# Altium PCB BuckBoostPCB.PcbDoc
Units mil, origin at the board's own origin, x right, y up, seen from the top; angles counter-clockwise.
Board outline 3600 x 2000 mil, 2 copper layers (Top Layer, Bottom Layer); 67 components, 34 nets, 185 pads, 94 vias.
Unrouted connection lines stored in the file: 4.
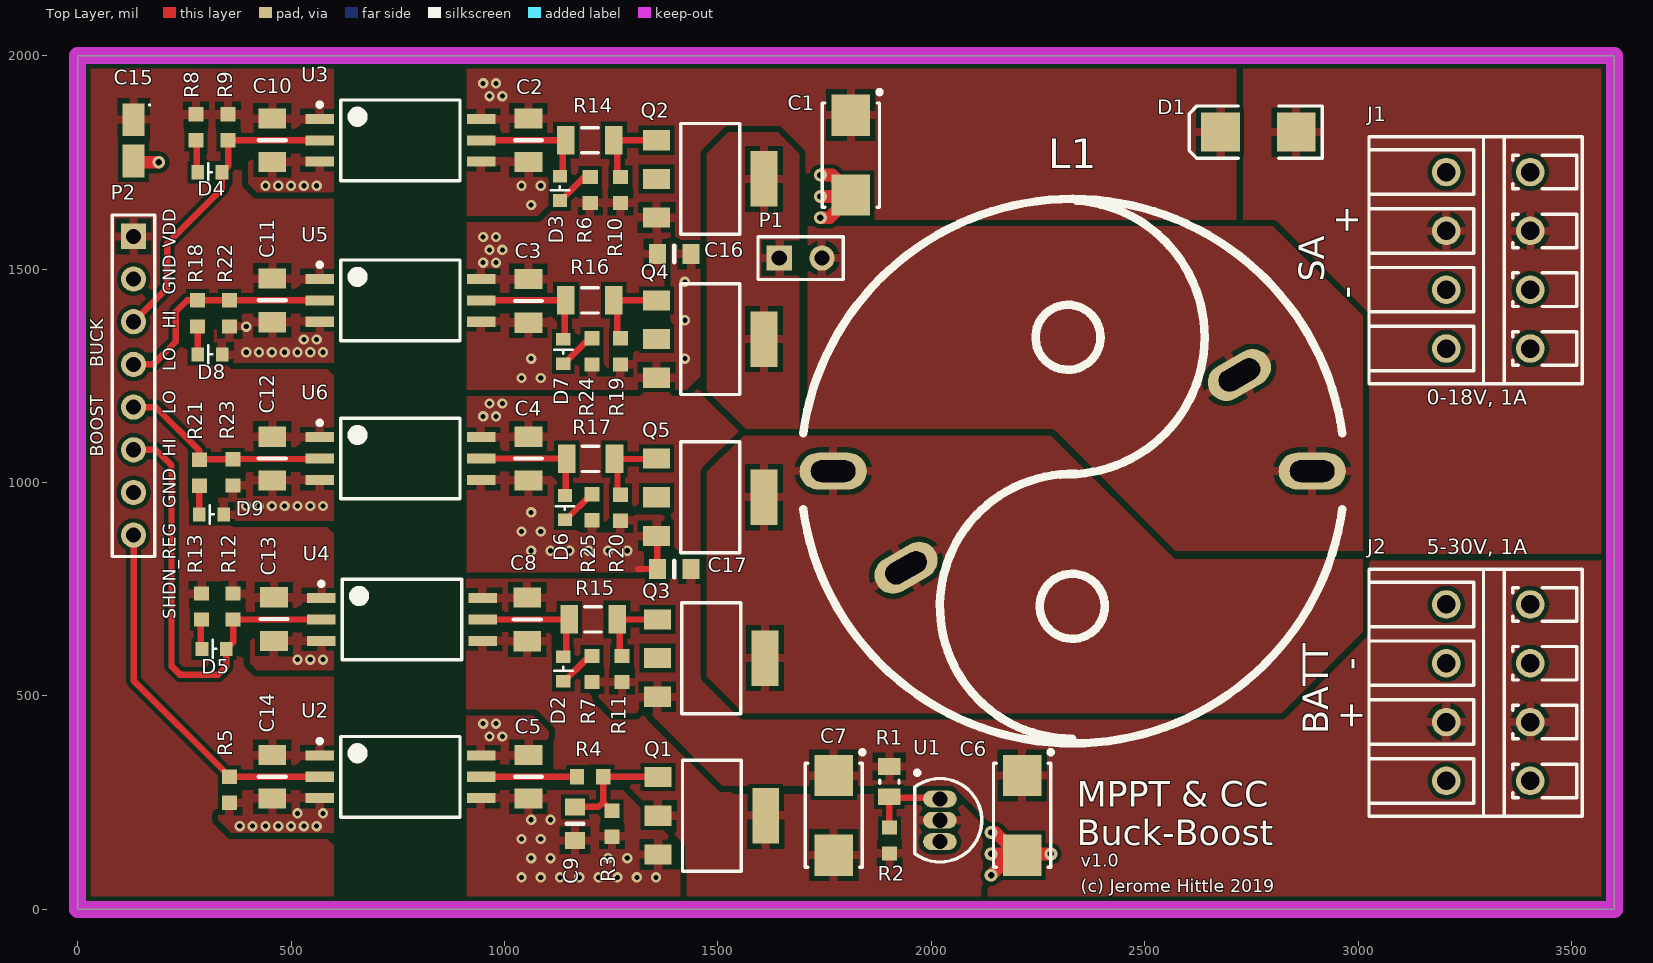
[diagram p0: Top Layer view]
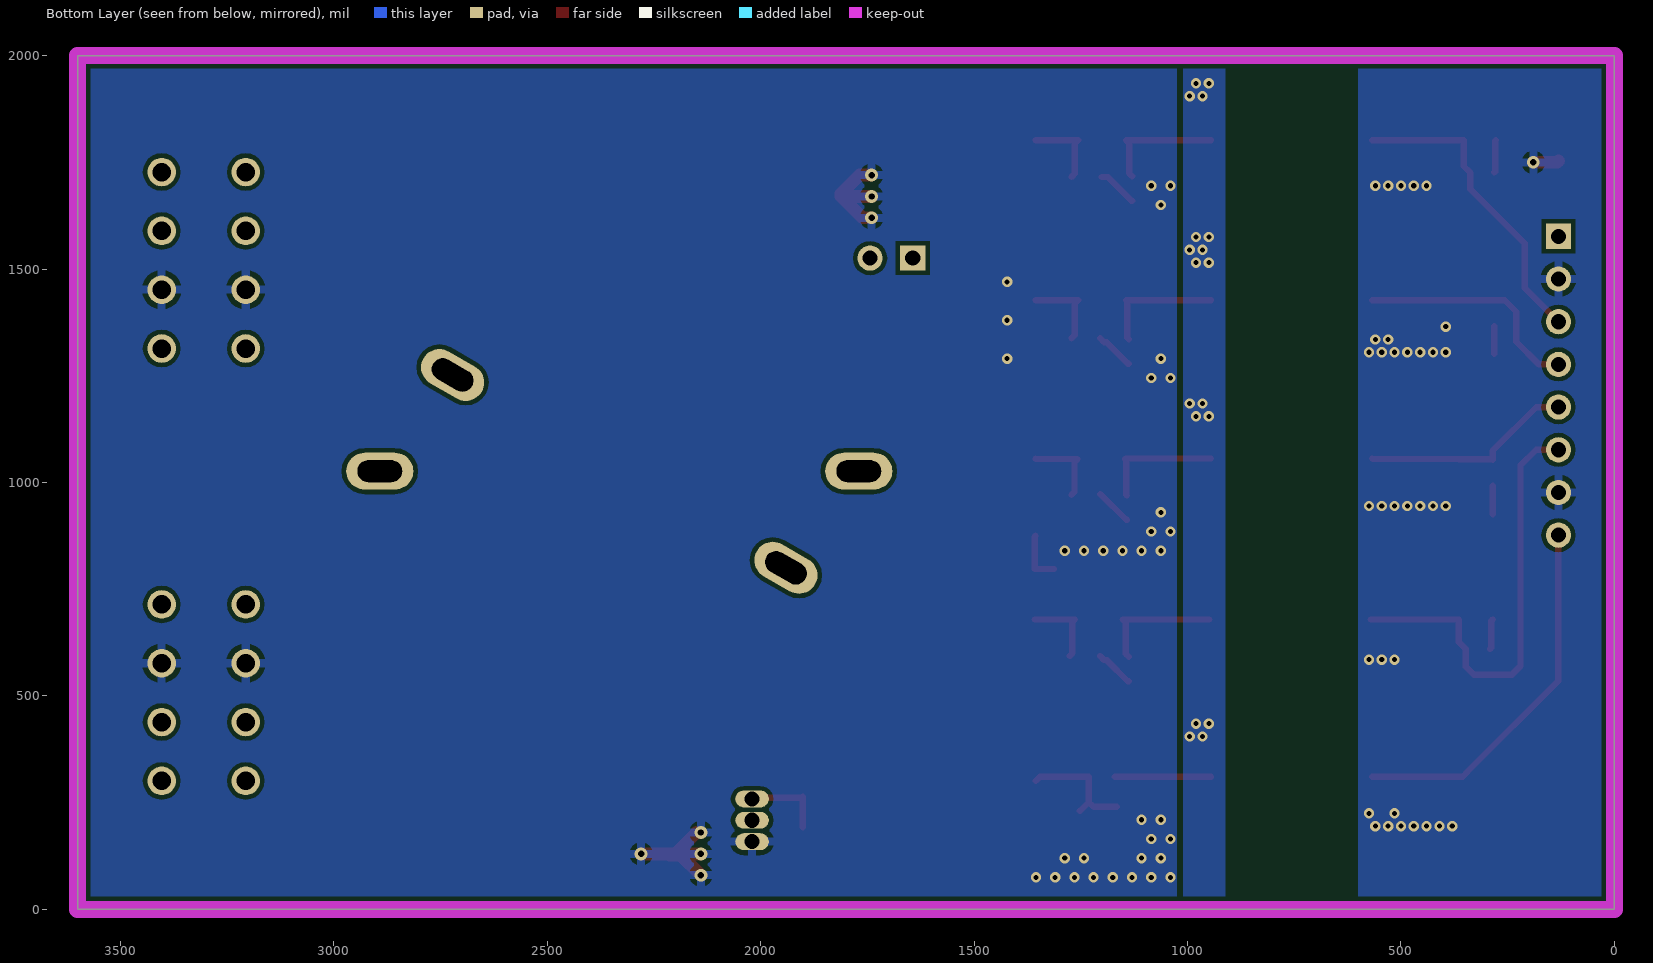
[diagram p1: Bottom Layer view, seen from below]

## Layer stack, top to bottom
Top Solder: solder mask 0.4, Solder Resist, Dk 3.5
Top Layer: signal copper 1.4
Dielectric 1: dielectric 12.6, FR-4, Dk 4.8
Bottom Layer: signal copper 1.4
Bottom Solder: solder mask 0.4, Solder Resist, Dk 3.5

## Board outline
0,0 3600,0 3600,2000 0,2000

## Design rules (kind name [scope] priority, off if disabled: settings)
BoardOutlineClearance [All] p1: gap=20 ignorepadtopadclearanceinfootprint=FALSE
Clearance Clearance_1 [All] p1: gap=8 ignorepadtopadclearanceinfootprint=FALSE except(10: Arc-Fill Arc-Poly Arc-Region Track-Fill Track-Poly Track-Region SMDPad-Fill SMDPad-Poly SMDPad-Region THPad-Fill THPad-Poly THPad-Region Via-Fill Via-Poly Via-Region; 15: Fill-Fill Fill-Poly Fill-Region Poly-Poly Poly-Region Region-Region)
MinimumSolderMaskSliver [All] p1: minsoldermaskwidth=4
PlaneConnect [All] p1: planeconnectstyle=Relief reliefexpansion=20 reliefentries=4 reliefconductorwidth=20 reliefairgap=12
PolygonConnect Stitching [IsStitchingVia] p1: connectstyle=Direct reliefconductorwidth=10 reliefentries=4 polygonreliefangle="90 Angle" airgapwidth=10
PolygonConnect [All] p2: connectstyle=Relief reliefconductorwidth=20 reliefentries=4 polygonreliefangle="90 Angle" airgapwidth=12
RoutingVias [All] p1: holewidth=15 width=30 viastyle="Through Hole" minholewidth=12 minwidth=20 maxholewidth=28 maxwidth=50
SilkToSilkClearance [All] p1: silktosilkclearance=4
SilkToSolderMaskClearance [IsPad] p1: minsilkscreentomaskgap=4 clearancetoexposedcopper=TRUE
SolderMaskExpansion [All] p1: expansion=4
Width [All] p1: maxlimit=30 minlimit=8 preferedwidth=12 minimp=50.000000 maximp=50.000000 favimp=50.000000
26 further rules are at their usual default settings.

## Components (designator, comment, footprint, x,y, rotation, side; value= is the part's Value field where it differs from the comment)
C1 "Cap Polarized" "C2312 Tantalum" 1811.5,1766.89 r270 top value=10uF
C2 "Cap Chip" C0805 1056.1,1801.57 r90 top value=0.1uF
C3 "Cap Chip" C0805 1056.1,1425.39 r90 top value=0.1uF
C4 "Cap Chip" C0805 1056.1,1056.1 r90 top value=0.1uF
C5 "Cap Chip" C0805 1056.1,310.63 r90 top value=0.1uF
C6 "Cap Polarized" "C2312 Tantalum" 2212.6,220.47 r270 top value=1uF
C7 "Cap Polarized" "C2312 Tantalum" 1771.26,220.47 r270 top value=10uF
C8 "Cap Chip" C0805 1053.15,679.13 r90 top value=0.1uF
C9 "Cap Chip" C0603 1165.35,200.79 r270 top value=0.1uF
C10 "Cap Chip" C0805 456.1,1801.57 r90 top value=0.1uF
C11 "Cap Chip" C0805 456.1,1426.57 r90 top value=0.1uF
C12 "Cap Chip" C0805 456.1,1056.1 r90 top value=0.1uF
C13 "Cap Chip" C0805 460,680 r90 top value=0.1uF
C14 "Cap Chip" C0805 456.1,310.63 r90 top value=0.1uF
C15 "Cap Polarized" "C1206 Tantalum" 131.1,1801.57 r270 top value=10uF
C16 "Cap Chip" C0603 1397.64,1535.43 r180 top value=0.1uF
C17 "Cap Chip" C0603 1397.64,797.24 r0 top value=0.1uF
D1 "MBRS260T3G" SMB 2765.75,1820.87 r180 top
D2 "RED" 0603_LED_Red 1137.8,562.99 r90 top
D3 "RED" 0603_LED_Red 1129.92,1688.98 r90 top
D4 "RED" 0603_LED_Red 309.65,1726.57 r0 top
D5 "RED" 0603_LED_Red 320,610 r0 top
D6 "RED" 0603_LED_Red 1141.73,940.94 r270 top
D7 "RED" 0603_LED_Red 1137.8,1307.09 r270 top
D8 "RED" 0603_LED_Red 310,1300 r0 top
D9 "RED" 0603_LED_Red 313.98,925.2 r0 top
J1 "1885670000" 1885670000 3275,1520.47 r90 top
J2 "1885670000" 1885670000 3275,507.68 r90 top
L1 "Inductor" 141060XC 2331.1,1026.57 r180 top value=10mH
P1 "" HDR1X2 1643.7,1525.59 r0 top
P2 "Header 8" HDR1X8 131.1,1576.57 r270 top
Q1 "BSP716N" SOT223 1485.98,219.45 r0 top
Q2 "ZXMP6A17G" SOT223 1482.09,1711.02 r0 top
Q3 "ZXMP6A17G" SOT223 1484.25,588.58 r0 top
Q4 "BSP716N" SOT223 1482.09,1336.02 r0 top
Q5 "BSP716N" SOT223 1482.09,965.55 r0 top
R1 "Resistor_Chip" R0805 1901.57,299.21 r270 top value=2.15k
R2 "Resistor_Chip" R0603 1901.57,161.42 r270 top value=249
R3 "Resistor_Chip" R0603 1251.97,200.79 r90 top value=1.0M
R4 "Resistor_Chip" R0603 1200.59,310.63 r180 top value=10k
R5 "Resistor_Chip" R0603 356.1,280.12 r270 top value=10k
R6 "Resistor_Chip" R0603 1200.79,1685.04 r90 top value=2k
R7 "Resistor_Chip" R0603 1204.72,562.99 r90 top value=2k
R8 "Resistor_Chip" R0603 277.56,1832.09 r90 top value=470
R9 "Resistor_Chip" R0603 352.56,1832.09 r90 top value=10k
R10 "Resistor_Chip" R0603 1271.65,1685.04 r270 top value=1.0M
R11 "Resistor_Chip" R0603 1275.59,562.99 r270 top value=1.0M
R12 "Resistor_Chip" R0603 364.17,709.65 r90 top value=10k
R13 "Resistor_Chip" R0603 290,709.49 r90 top value=470
R14 "Resistor_Chip" R1206 1200,1801.57 r0 top value=10
R15 "Resistor_Chip" R1206 1207.68,679.13 r180 top value=10
R16 "Resistor_Chip" R1206 1200,1426.57 r0 top value=10
R17 "Resistor_Chip" R1206 1201.77,1055.12 r180 top value=10
R18 "Resistor_Chip" R0603 281.1,1396.06 r90 top value=470
R19 "Resistor_Chip" R0603 1271.65,1307.09 r90 top value=1.0M
R20 "Resistor_Chip" R0603 1271.65,940.94 r90 top value=1.0M
R21 "Resistor_Chip" R0603 285.43,1022.64 r90 top value=470
R22 "Resistor_Chip" R0603 356.1,1396.06 r90 top value=10k
R23 "Resistor_Chip" R0603 364.17,1023.62 r90 top value=10k
R24 "Resistor_Chip" R0603 1204.72,1307.09 r270 top value=2k
R25 "Resistor_Chip" R0603 1204.72,941.93 r90 top value=2k
U1 "LM337L" TO-92A 2020.08,208.66 r180 top
U2 "ADuM4120" "SOIC RI-6-1" 756.1,310.63 r0 top
U3 "ADuM4120" "SOIC RI-6-1" 756.1,1801.57 r0 top
U4 "ADuM4120" "SOIC RI-6-1" 759.84,679.13 r0 top
U5 "ADuM4120" "SOIC RI-6-1" 756.1,1426.57 r0 top
U6 "ADuM4120" "SOIC RI-6-1" 756.1,1056.1 r0 top

## Footprints (in the part's own frame and the unit in brackets; to place one, negate y for a bottom-side part, rotate by r counter-clockwise, add the part's x,y. Pads: shape width x height; smd on the part's side, far side on the other; paste and mask are expansions set on the pad)
0603_LED_Red [mm] "Chip LED Diode, 2-Leads, Body 1.60x0.75mm, IPC Medium Density"
  rect 0.75x0.85 smd: 1(-0.725,0) 2(0.725,0)
  silkscreen extent -0.1,-0.55 0.12,0.55, body extent -0.85,-0.4 0.85,0.4, height 0.45
141060XC [mm] "10mH inductor 1410606C or 1410604C"
  oval 4x2.2 hole 1.3 slot 2.65 at 0 deg: 1(-14.25,0) 2(14.25,0)
  oval 4x2.2 hole 1.3 slot 2.65 at 30 deg rot 30: 1(-9.916,-5.725) 2(9.916,5.75)
  silkscreen extent -16.04,-16.2 16.04,16.2, body extent -16.2,-16.2 16.2,16.2, height 23.5
1885670000 [mm] "TERM BLOCK 4POS 45DEG 3.5MM PCB"
  round 1.7 hole 1.1: 1(-5.25,-3.25) 1(-5.25,1.75) 2(-1.75,1.75) 2(-1.75,-3.25) 3(1.75,1.75) 3(1.75,-3.25) 4(5.25,-3.25) 4(5.25,1.75)
  silkscreen extent -7.35,-6.35 7.35,6.35, body extent -7.35,-6.35 7.35,6.35, height 13.17
C0603 [mm] "Chip Capacitor, 2-Leads, 0603, IPC Medium Density"
  rect 1x1.2 smd: 1(-1,0) 2(1,0)
  silkscreen extent 0,-0.5 0,0.5, body extent -0.85,-0.45 0.85,0.45, height 0.9
C0805 [mm] "Chip Capacitor, 2-Leads, 0805, IPC Medium Density"
  rect 1.2x1.65 smd: 1(-1.3,0) 2(1.3,0)
  silkscreen extent 0,-0.8 0,0.8, body extent -1.05,-0.67 1.05,0.67, height 1.35
"C1206 Tantalum" [mm] "Molded Capacitor, 2-Leads, Body 3.20x1.65mm, IPC Medium Density"
  rect 1.95x1.3 smd: 1(-1.225,0) 2(1.225,0)
  silkscreen extent -2.15,0.9 -2.05,1, body extent -1.92,-0.9 1.92,0.9, height 1.8
"C2312 Tantalum" [mm] "Molded Capacitor, 2-Leads, Body 6.00x3.25mm, IPC Medium Density"
  rect 2.45x2.3 smd: 1(-2.375,0) 2(2.375,0)
  silkscreen extent -3.87,-1.7 3.1,1.83, body extent -3.32,-1.7 3.32,1.7, height 2.8
HDR1X2 [mm] "Connector; Header; 2 Position"
  rect 1.5x1.5 hole 0.9: 1(0,0)
  round 1.5 hole 0.9: 2(2.54,0)
  silkscreen extent -1.27,-1.27 3.81,1.27
HDR1X8 [mm] "Connector; Header; 8 Position"
  rect 1.5x1.5 hole 0.9: 1(0,0)
  round 1.5 hole 0.9: 2(2.54,0) 3(5.08,0) 4(7.62,0) 5(10.16,0) 6(12.7,0) 7(15.24,0) 8(17.78,0)
  silkscreen extent -1.27,-1.27 19.05,1.27
R0603 [mm] "Chip Resistor, 2-Leads, 0603, IPC Medium Density"
  rect 0.85x0.9 smd: 1(-0.775,0) 2(0.775,0)
  body extent -0.85,-0.45 0.85,0.45, height 0.55
R0805 [mm] "Chip Resistor, 2-Leads, 0805, IPC Medium Density"
  rect 1x1.35 smd: 1(-0.9,0) 2(0.9,0)
  silkscreen extent -0.1,-0.58 0.1,0.58, body extent -1.05,-0.67 1.05,0.67, height 0.6
R1206 [mm] "Chip Resistor, 2-Leads, 1206, IPC Medium Density"
  rect 1.05x1.7 smd: 1(-1.425,0) 2(1.425,0)
  silkscreen extent -0.5,-0.75 0.5,0.75, body extent -1.6,-0.85 1.6,0.85, height 0.65
SMB [mm] "DO-214-AA/SMB; 2 C-Bend Leads; Body 5.3 x 3.6 mm, inc. leads (LxW)"
  rect 2.3x2.3 smd: 1(-2.25,0) 2(2.25,0)
  silkscreen extent -3.8,-1.55 4.1,1.55
"SOIC RI-6-1" [mm] "SOIC, 6-Leads, Wide Body 4.58x7.50mm, Pitch 1.27mm, IPC Medium Density"
  rect 1.7x0.6 smd: 1(-4.8,1.27) 2(-4.8,0) 3(-4.8,-1.27) 4(4.8,-1.27) 5(4.8,0) 6(4.8,1.27)
  silkscreen extent -4.92,-2.4 3.55,2.4, body extent -5.16,-2.4 5.16,2.4, height 2.65
SOT223 [mm] "SOT223, 4-Leads, Body 6.50x7.00mm (avg), Pitch 2.30mm, IPC Medium Density"
  rect 1.6x1.2 smd: 1(-3.2,2.3) 2(-3.2,0) 3(-3.2,-2.3)
  rect 1.6x3.3 smd: 2(3.2,0)
  silkscreen extent -1.75,-3.3 1.75,3.3, body extent -1.78,-3.27 1.78,3.27, height 1.65
TO-92A [mm] "TO, Flat Index; 3 In-Line, Axial Leads; Body Dia. 4.5mm; Leads 0.51 x 0.48 mm (max)"
  oval 2x1 hole 0.9 mask+0.076: 1(0,-1.27) 2(0,0) 3(0,1.27)
  silkscreen extent -2.48,-2.95 1.5,2.48, body extent -2.48,-2.5 1.5,2.5, height 6.86

## Part data
C1 C7: "Capacitor, 600mohm, 200mA@100kHz", Part Number=TRJC106K035R0600, Voltage=35V
C2 C3 C4 C5 C8 C10 C11 C12 C13 C14: "Capacitor", Part Number=CL21B104KBCNNNC, Voltage=50V
C6: "Capacitor, 600mohm, 200mA@100kHz", Part Number=TAJC105K050RNJ, Voltage=50V
C9 C16 C17: "Capacitor", Part Number=CL10B104KB8NNNC, Voltage=50V
C15: "Capacitor, 600mohm, 200mA@100kHz", Part Number=TAJA106K016RNJV, Voltage=16V
D1: library part "D Schottky", "Schottky Diode", LatestRevisionDate=17-Jul-2002, LatestRevisionNote="Re-released for DXP Platform.", PackageDescription="DO-214-AA/SMB; 2 C-Bend Leads; Body 5.3 x 3.6 mm, inc. leads (LxW)", PackageReference=SMB, Part Number=MBRS260T3G, Published=8-Jun-2000, Publisher="Altium Limited"
D2 D3 D4 D5 D6 D7 D8 D9: library part LED0, "Red LED", Part Number=LTST-C193KRKT-5A, LatestRevisionDate=08-Jul-2005, LatestRevisionNote="Mech Layer 1 removed.", PackageDescription="LED; 2 Leads", PackageReference=LED-0, Published=8-Jun-2000, Publisher="Altium Limited"
J1 J2: "TERM BLOCK 4POS 45DEG 3.5MM PCB", Current=12A, Voltage=300V, 1k Price=0.85073, ComponentLink1Description=Digikey, ComponentLink1URL=https://www.digikey.com/product-detail/en/1885670000/281-2811-ND/2410728?utm_campaign=buynow&WT.z_cid=ref_octopart_dkc_buynow&utm_medium=aggregator&curr=usd&site=us&utm_source=octopart, ComponentLink2Description=Datasheet, ComponentLink2URL=https://media.digikey.com/pdf/Data%20Sheets/Weidmuller%20PDFs/1885670000.pdf, Part Number=1885670000
L1: Part Number="1410606C or 1410604C", Code_IEC=1005, Code_JEITA=0402, LatestRevisionDate=29-May-2009, LatestRevisionNote="IPC-7351 Footprint Added.", PackageDescription="Chip Inductor", PackageReference=0402-A, Published=8-Jun-2000, Publisher="Altium Limited"
P1: library part "Header 2", "Header, 2-Pin, 100mil", LatestRevisionDate=17-Jul-2002, LatestRevisionNote="Re-released for DXP Platform.", Publisher="Altium Limited"
P2: "Header, 8-Pin, 100mil", LatestRevisionDate=17-Jul-2002, LatestRevisionNote="Re-released for DXP Platform.", Publisher="Altium Limited"
Q1 Q4 Q5: library part NMOS, "N-Channel MOSFET", Part Number=BSP716NH6327XTSA1
Q2 Q3: library part PMOS, "P-Channel MOSFET", Part Number=ZXMP6A17GTA
R1: "Resistor", Part Number=RC0805FR-072K15L, Power=0.125
R2: "Resistor", Part Number=RC0603FR-07249RL, Power=0.100
R3 R10 R11 R19 R20: "Resistor", Part Number=RC0603FR-071ML, Power=0.100
R4 R5 R9 R12 R22 R23: "Resistor", Part Number=RC0603FR-0710KL, Power=0.100
R6 R7 R24 R25: "Resistor", Part Number=RC0805FR-072KL, Power=0.125
R8 R13 R18 R21: "Resistor", Part Number=RC0603FR-07470RL, Power=0.100
R14 R15 R16 R17: "Resistor", Part Number=RC1206FR-0710RL, Power=0.250
U1: library part "Neg Volt Reg - Adj", "Negative Voltage Regulator", Part Number=LM337LZ/NOPB
U2 U3 U4 U5 U6: "Isolated Gate-Driver", Part Number=ADuM4120-1ARIZ

## Via types
v1: diameter 24, hole 12, Top Layer to Bottom Layer, tented both sides, 86 vias
v2: diameter 30, hole 15, Top Layer to Bottom Layer, tented both sides, 8 vias

## Nets (pads, with @x,y where several pads share a name; then routed paths per layer and width w, separated by ;. In a path a pad name is that pad's centre, name@x,y a point inside that pad or via, vN(x,y) a via of type N, cw(c..) or ccw(c..) an arc to the next point about the centre after c; other vN are vias at no path point)
3.3V: C10.2 C11.2 C12.2 C13.2 C14.2 C15.1 P2.1 R8.2 R9.2 R12.2 R13.2 U2.1 U3.1 U4.1 U5.1 U6.1
-12V: C7.2 C8.1 Q1.2 R2.2 U1.2 U4.4
BOOST_HI: D5.2 P2.6 R12.1 U4.2 | length 1042.2
  Top Layer w15: P2.6 183.43,1076.57 220,1040 220,570 240,550 329.76,550 348.54,568.79 D5.2 364.17,625.63 R12.1 U4.2
BOOST_LO: P2.5 R21.2 R23.2 U6.2 | length 500.9
  Top Layer w15: P2.5 183.43,1176.57 285.43,1074.57 R21.2 286.42,1054.13 R23.2 365.16,1055.12 566.14,1055.12 U6.2
BUCK_HI: D4.2 P2.3 R9.1 U3.2 | length 731.3
  Top Layer w15: P2.3 210,1455.47 210,1560 337.34,1687.34 337.34,1725.73 D4.2 352.56,1740.94 R9.1 U3.2
BUCK_LO: P2.4 R18.2 R22.2 U5.2 | length 534.5
  Top Layer w15: P2.4 176.57,1276.57 230.04,1330.04 230.04,1400.04 256.57,1426.57 R18.2 ; R18.2@285.76,1426.57 R22.2 U5.2
NetC9_1: C9.1 Q1.1 R3.2 R4.1 | length 286.8
  Top Layer w15: C9.1 1220.08,240.16 1231.1,251.18 ; R3.2 1250.98,231.3 1231.1,251.18 ; Q1.1@1355.12,301.18 1345.67,310.63 R4.1 1231.1,251.18
NetD1_1: D1.1 J1.3
NetD2_1: D2.1 R7.2 | length 91.4
  Top Layer w15: D2.1 1139.76,534.45 1189.59,584.27 1195.49,584.27 R7.2
NetD2_2: D2.2 R15.2 U4.5 | length 296.1
  Top Layer w15: U4.5 R15.2 1144.69,672.24 1144.69,598.43 D2.2
NetD3_1: D3.1 R6.2 | length 93.7
  Top Layer w15: D3.1 1131.89,1660.43 1187.01,1715.55 R6.2
NetD3_2: D3.2 R14.1 U3.5 | length 288.7
  Top Layer w15: U3.5 R14.1 1136.91,1794.59 1136.91,1724.51 D3.2
NetD4_1: D4.1 R8.1 | length 76.5
  Top Layer w15: R8.1 279.33,1799.8 279.33,1728.35 D4.1
NetD5_1: D5.1 R13.1 | length 71.6
  Top Layer w15: R13.1@285.43,679.13 288.44,676.12 288.44,613.01 D5.1
NetD6_1: D6.1 R17.2 U6.5 | length 288.3
  Top Layer w15: U6.5 1144.69,1056.1 R17.2 1143.7,1053.15 1143.7,971.46 D6.1
NetD6_2: D6.2 R25.2 | length 87.9
  Top Layer w15: D6.2 1143.7,912.4 1203.74,972.44 R25.2
NetD7_1: D7.1 R16.1 U5.5 | length 292.3
  Top Layer w15: U5.5 R16.1 1140.85,1423.52 1140.85,1338.68 D7.1
NetD7_2: D7.2 R24.1 | length 91.4
  Top Layer w15: D7.2 1139.76,1278.54 1189.59,1328.37 1195.49,1328.37 R24.1
NetD8_1: D8.1 R18.1 | length 64
  Top Layer w15: D8.1@281.1,1301.57 R18.1
NetD9_1: D9.1 R21.1 | length 66.9
  Top Layer w15: D9.1 R21.1
NetL1_1: L1.1 P1.2
NetL1_2: L1.2 Q3.2 Q5.2
NetP1_1: P1.1 Q2.2 Q4.2
NetQ2_G: Q2.1 R10.1 R14.2 | length 192.5
  Top Layer w15: R10.1 1263.88,1723.33 1263.88,1793.8 R14.2 Q2.1
NetQ3_G: Q3.1 R11.1 R15.1 | length 185
  Top Layer w15: R11.1 1269.69,599.41 1269.69,673.23 R15.1 Q3.1
NetQ4_G: Q4.1 R16.2 R19.2 | length 195.4
  Top Layer w15: R19.2 1263.88,1345.37 1263.88,1418.8 R16.2 Q4.1
NetQ5_G: Q5.1 R17.1 R20.2 | length 188
  Top Layer w15: R20.2 1264.76,978.35 1264.76,1048.23 R17.1 1355.12,1055.12 Q5.1
NetR1_2: R1.2 R2.1 U1.1 | length 192.5
  Top Layer w15: R2.1 R1.2 1904.13,261.22 2017.52,261.22 U1.1
NetR4_2: R4.2 U2.5 | length 225
  Top Layer w15: U2.5 R4.2
PGND: C1.2 C2.1 C3.1 C4.1 C5.1 C6.2 C9.2 C16.1 C17.1 J1.2 J2.3 Q1.3 Q4.3 Q5.3 R3.1 R19.1 R20.1 R24.2 R25.1 U1.3 U2.4 U3.4 U5.4 U6.4 | length 694.2
  Top Layer w15: 1312.76,797.24 C17.1 1358.27,872.83 Q5.3
  Top Layer w30: v2(1740,1620) 1761.06,1620 1811.5,1670.43 C1.2 ; v2(1740,1670) 1808.11,1670 C1.2 ; v2(1740,1720) 1767.83,1720 1811.5,1676.34 C1.2 ; v2(2140,80) 2186.97,126.97 C6.2@2203.03,126.97 ; v2(2140,130) C6.2@2200,130 ; v2@2150.2,179.8 C6.2@2200,130 ; v2(2280,130) 2215.63,130 C6.2 ; C6.2@2200,130 C6.2@2203.03,126.97 ; C6.2@2200,130 2209.57,130 C6.2 ; C6.2@2203.03,126.97 C6.2
  other v1: 1040,75 1085,75 1130,75 1175,75 1220,75 1265,75 1310,75 1355,75 1062.5,120 1107.5,120 1242.5,120 1287.5,120 1040,165 1085,165 1062.5,210 1107.5,210 1062.5,840 1107.5,840 1152.5,840 1197.5,840 1242.5,840 1287.5,840 1040,885 1085,885 1062.5,930 1040,1245 1085,1245 1062.5,1290 1422.5,1290 1422.5,1380 1422.5,1470 1062.5,1650 1040,1695 1085,1695
  other v2: 2140,180
SGND: C10.1 C11.1 C12.1 C13.1 C14.1 C15.2 D8.2 D9.2 P2.2 P2.7 R5.2 R22.1 R23.1 U2.3 U3.3 U4.3 U5.3 U6.3 | length 60.3
  Top Layer w30: C15.2 134.45,1750 v2(190,1750)
  other v1: 380,195 410,195 440,195 470,195 500,195 530,195 560,195 515,225 575,225 515,585 545,585 575,585 395,945 425,945 455,945 485,945 515,945 545,945 575,945 395,1305 425,1305 455,1305 485,1305 515,1305 545,1305 575,1305 530,1335 560,1335 395,1365 440,1695 470,1695 500,1695 530,1695 560,1695
SHDN_REG: P2.8 R5.1 U2.2 | length 870.7
  Top Layer w15: P2.8 131.1,535.63 345.89,320.85 345.89,319.86 355.12,310.63 R5.1 U2.2
Vbatt: C6.1 C7.1 C8.2 C17.2 J2.2 Q3.3 R1.1 R7.1 R11.2 U4.6
Vsa: C1.1 C2.2 C3.2 C4.2 C5.2 C16.2 D1.2 Q2.3 R6.1 R10.2 U2.6 U3.6 U5.6 U6.6
  other v1: 965,405 995,405 950,435 980,435 950,1155 980,1155 965,1185 995,1185 950,1515 980,1515 965,1545 995,1545 950,1575 980,1575 965,1905 995,1905 950,1935 980,1935
pads on no net: J1.1 J1.4 J2.1 J2.4

## Polygon pours and split planes (outlines as drawn)
Vsa on Top Layer "Top Layer-Vsa" (solid, pour order 87): 911.48,1625 1077.36,1625 1127.36,1675 1305,1675 1370,1610 1370,1470 1300,1400 911.48,1400
Vsa on Top Layer "Top Layer-Vsa 1" (solid, remove dead copper, pour order 63): 2720,2000 2720,840 911.48,840 911.48,2000
PGND on Top Layer "Top Layer-PGND" (solid, remove dead copper, pour order 55): 911.48,775 911.48,1024.94 1101.05,1024.94 1199.3,926.69 1369.15,924.15 1387.8,905.51 1387.8,775
-12V on Top Layer "Top Layer--12V" (solid, remove dead copper, pour order 54): 910,465.97 1070,465.97 1074.22,464.22 1114.22,424.22 1115.97,420 1115.97,291.4 1279.53,291.4 1283.75,289.65 1421.54,151.86 1423.29,147.64 1423.29,5.97 2120.02,5.97 2120.02,219.98 2070,270 1535.05,270 1337.97,467.09 1249,467.09 1110,600 1110,649.61 910,649.61 910,467.09
Vbatt on Top Layer "Top Layer-Vbatt" (solid, remove dead copper, pour order 52): 910,674.65 1040.85,674.65 1255.49,460 1340,460 1510,290 2050,290 2131.95,208.05 2131.95,0 3600,0 3600,816.93 1444.32,819.88 1394.44,775 910,775
3.3V on Top Layer "Top Layer-3.3V" (solid, remove dead copper, pour order 50): 0,0 600,0 600,2000 0,2000
NetD1_1 on Top Layer "Top Layer-NetD1_1" (solid, pour order 61): 3600,820 2730,820 2730,2000 3600,2000
NetL1_1 on Top Layer "Top Layer-NetL1_2 1" (solid, pour order 43): 1710,1600 2800,1600 3010,1390 3010,840 2390,840 2104.71,1125.29 1710,1125.29
NetP1_1 on Top Layer "NETP1_1_L01_P042" (solid, pour order 42): 1524.53,1820 1474.35,1769.83 1474.35,1215.65 1600,1090 1690,1090 1690,1770 1640,1820
NetL1_2 on Top Layer "Top Layer-NetL1_2" (solid, pour order 41): 1560,1110 1474.35,1024.35 1474.35,545.65 1560,460 2820,460 3010,650 3010,820 2570,820 2280,1110
PGND on Top Layer "Top Layer-PGND 1" (solid, remove dead copper, pour order 53): 911.48,0 911.48,279.46 1277.06,279.46 1411.35,145.17 1411.35,0
Vsa on Top Layer "Top Layer-Vsa 2" (solid, remove dead copper, pour order 51): 910,454.03 910,340 1104.03,340 1104.03,417.53 1067.53,454.03
PGND on Top Layer "Top Layer-PGND 2" (solid, remove dead copper, pour order 57): 911.48,1625 911.48,1761.81 1102.36,1761.81 1102.36,1650 1077.36,1625
PGND on Top Layer "Top Layer-PGND 3" (solid, remove dead copper, pour order 56): 911.48,1216.93 911.48,1395.41 1104.59,1395.41 1190,1310 1330.08,1310 1390,1369.92 1390,1559.5 1459.88,1560.66 1459.88,1249.88 1426.93,1216.93
no net on Top Layer "Top Layer-No Net" (solid, pour order 58): 911.48,0
SGND on Top Layer "Top Layer-SGND 1" (solid, pour order 48): 600,648.43 423.9,648.43 403.9,628.43 403.9,576.1 420,560 600,560
SGND on Top Layer "Top Layer-SGND" (solid, pour order 49): 600,279.06 354.53,279.05 330,254.53 330,210 360,180 600,180
SGND on Top Layer "Top Layer-SGND" (solid, pour order 46): 600,1395 354.53,1395 320,1360.47 320,1320.47 360,1280.47 600,1280.47
SGND on Top Layer "Top Layer-SGND" (solid, pour order 47): 600,1024.53 354.53,1024.53 330,1000 330,940 360,910 600,910
SGND on Top Layer "Top Layer-SGND 2" (solid, pour order 45): 600,1770 420,1770 400,1750 400,1700 420,1680 600,1680
PGND on Bottom Layer "Bottom Layer-PGND" (solid, pour order 59): 3600,0 1025,0 1025,2000 3600,2000
Vsa on Bottom Layer "Bottom Layer-Vsa" (solid, pour order 60): 911.48,0 1025,0 1025,2000 917.32,2000 911.48,1994.16
SGND on Bottom Layer "Bottom Layer-SGND" (solid, remove dead copper, pour order 44): 0,0 600,0 600,2000 0,2000

## Keep-outs
Keep-Out Layer:
  the board outline again, w40

## Silkscreen, mask and mechanical layers (free items; w line width, h text height)
Top Overlay:
  circle w20: c2330,710 r76.16
  circle w20: c2320,1340 r76.16
  lines w20: 2330,400 cw(c2330,710) 2339.84,1019.84 ccw(c2319.17,1340.01) 2340,1660.16
  text "+" at 3000,1580 h60 r90
  text "VDD" at 230,1550 h30 r90
  text "SA" at 2920,1470 h60 r90
  text "GND" at 230,1440 h30 r90
  text "-" at 3000,1430 h60 r90
  text "HI" at 230,1360 h30 r90
  text "BUCK" at 60,1270 h30 r90
  text "LO" at 230,1260 h30 r90
  text "0-18V, 1A" at 3160,1170 h60
  text "LO" at 230,1160 h30 r90
  text "BOOST" at 60,1060 h30 r90
  text "HI" at 230,1060 h30 r90
  text "GND" at 230,940 h30 r90
  text "5-30V, 1A" at 3160,820 h60
  text "SHDN_REG" at 230,680 h30 r90
  text "-" at 3010,560 h60 r90
  text "+" at 3010,420 h60 r90
  text "BATT" at 2930,410 h60 r90
  text "MPPT & CC / Buck-Boost" at 2340,150 h60
  text "v1.0" at 2350,100 h30
  text "(c) Jerome Hittle 2019" at 2350,40 h30
Mechanical 1:
  lines w0.1: -0.05,0 ccw(c0,0) 0,-0.05 ; -0.05,0 ccw(c0,0) 0,-0.05 ; -0.05,0 -0.05,2000 ; -0.05,2000 cw(c0,2000) 0,2000.05 ; -0.05,2000 cw(c0,2000) 0,2000.05 ; 0,-0.05 3600,-0.05 ; 0,2000.05 3600,2000.05 ; 3600,-0.05 ccw(c3600,0) 3600.05,0 ; 3600,-0.05 ccw(c3600,0) 3600.05,0 ; 3600,2000.05 cw(c3600,2000) 3600.05,2000 ; 3600,2000.05 cw(c3600,2000) 3600.05,2000 ; 3600.05,0 3600.05,2000